# EAGLE board prototype_total_schematic_2355_Depricated (EAGLE 8.4.1)
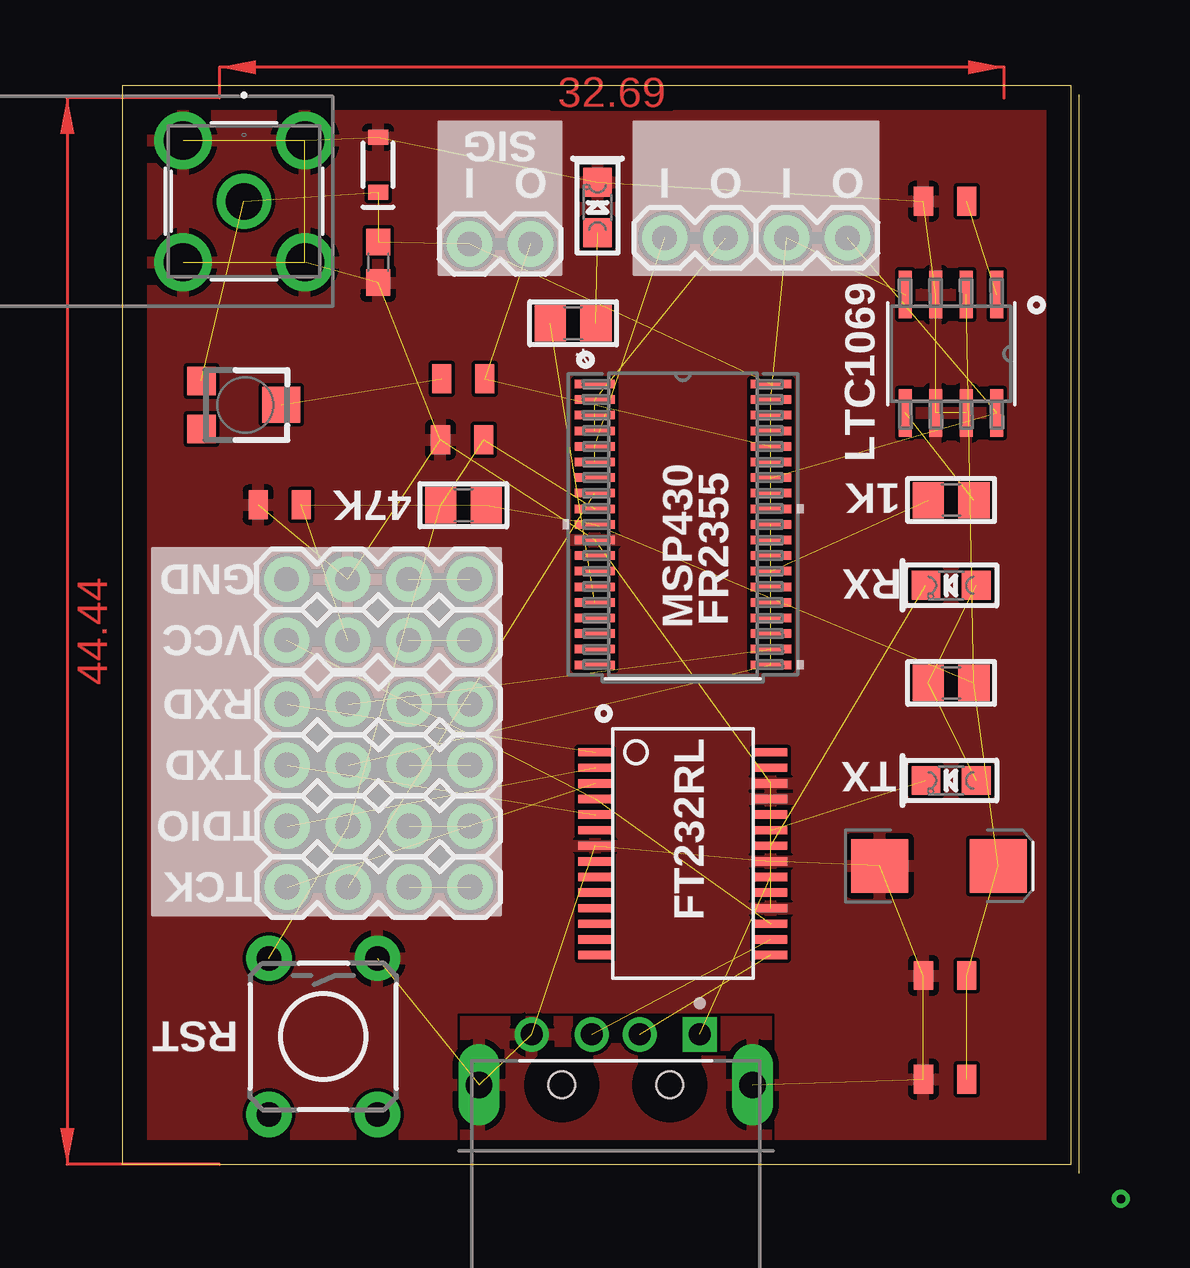
[diagram p0: board, top side]
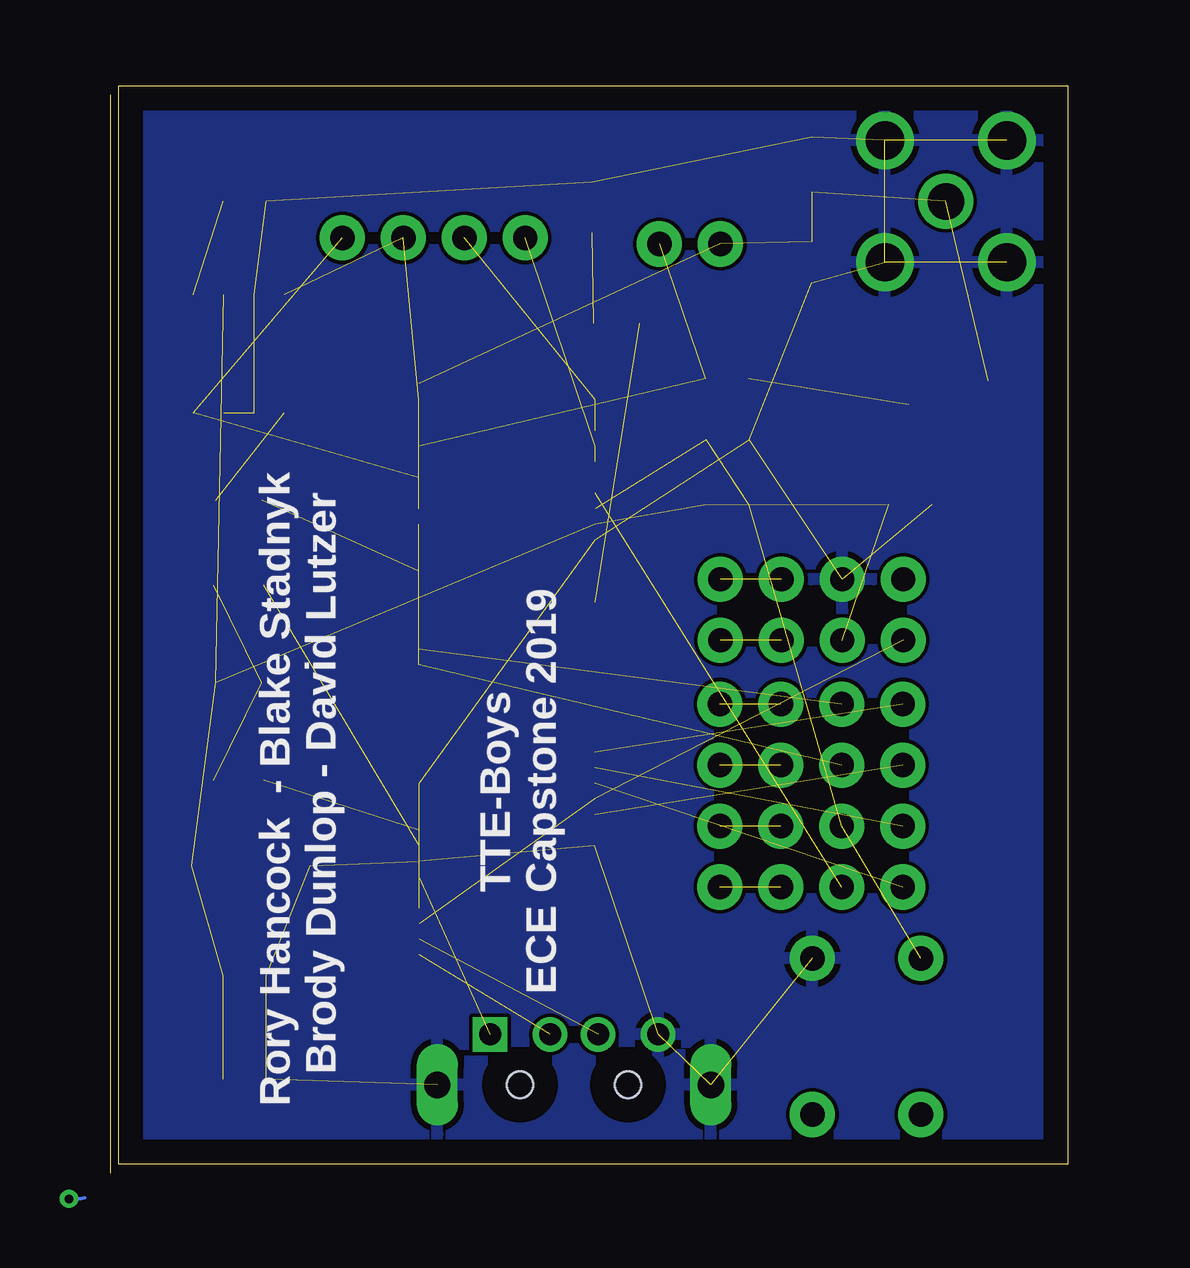
[diagram p1: board, bottom side, seen from below]

Size 39.88 x 45.32 mm. Coordinates in mm from the lower left corner, seen from the top.
Outline: 39.88,0 39.88,44.95
Outline: 0,0.37 39.55,0.37 39.55,45.32 0,45.32 0,0.37
Copper layers (1*16): Top 0.035mm / dielectric 1.5mm / Bottom 0.035mm
Design rules "default": minimum track width 6mil, minimum drill 0.35mm, track to track 6mil, track to pad 6mil, pad to pad 6mil, via to via 6mil, smd to smd 6mil, copper to edge 40mil, drill to drill 6mil, minimum pad ring 10mil, minimum via ring 8mil, stop-mask expansion 4mil, vias tented up to drill 0mil, thermal gap 10mil

## Footprints (pad centres in the part's own frame; a part is rotated, then mirrored left to right if it is on the bottom)
0805 = smd 1.3 x 1.5: 1 -0.95,0; 2 0.95,0
EIA6032-NOM = smd 2.37 x 2.23: A 2.47,0; C -2.47,0
0805' = smd 0.8 x 1.2: 1 -0.9,0; 2 0.9,0
SOD-323 = smd 0.63 x 0.83: A 1.15,0; C -1.15,0
1X02 = drill 1.016 pad 1.88: 1 0,0; 2 2.54,0
SSOP28DB = smd 0.348 x 1.397: 1 -4.225,-3.656; 2 -3.575,-3.656; 3 -2.925,-3.656; 4 -2.275,-3.656; 5 -1.625,-3.656; 6 -0.975,-3.656; 7 -0.325,-3.656; 8 0.325,-3.656; 9 0.975,-3.656; 10 1.625,-3.656; 11 2.275,-3.656; 12 2.925,-3.656; 13 3.575,-3.656; 14 4.225,-3.656; 15 4.225,3.656; 16 3.575,3.656; 17 2.925,3.656; 18 2.275,3.656; 19 1.625,3.656; 20 0.975,3.656; 21 0.325,3.656; 22 -0.325,3.656; 23 -0.975,3.656; 24 -1.625,3.656; 25 -2.275,3.656; 26 -2.925,3.656; 27 -3.575,3.656; 28 -4.225,3.656
1X04 = drill 1.016 pad 1.88: 1 0,0; 2 2.54,0; 3 5.08,0; 4 7.62,0
MOLEX_48037-0001_0 = drill 0.92 pad 1.42 square: 1 3.5,10.5 | drill 0.92 pad 1.42: 2 1,10.5; 3 -1,10.5; 4 -3.5,10.5 | drill 1.1 pad 1.7 long: 5 -5.7,8.4; 6 5.7,8.4 | hole 1.1: -2.25,8.4; 2.25,8.4
DA38 = smd 1.676 x 0.356: 1 -3.67,5.85; 2 -3.67,5.2; 3 -3.67,4.55; 4 -3.67,3.9; 5 -3.67,3.25; 6 -3.67,2.6; 7 -3.67,1.95; 8 -3.67,1.3; 9 -3.67,0.65; 10 -3.67,0; 11 -3.67,-0.65; 12 -3.67,-1.3; 13 -3.67,-1.95; 14 -3.67,-2.6; 15 -3.67,-3.25; 16 -3.67,-3.9; 17 -3.67,-4.55; 18 -3.67,-5.2; 19 -3.67,-5.85; 20 3.67,-5.85; 21 3.67,-5.2; 22 3.67,-4.55; 23 3.67,-3.9; 24 3.67,-3.25; 25 3.67,-2.6; 26 3.67,-1.95; 27 3.67,-1.3; 28 3.67,-0.65; 29 3.67,0; 30 3.67,0.65; 31 3.67,1.3; 32 3.67,1.95; 33 3.67,2.6; 34 3.67,3.25; 35 3.67,3.9; 36 3.67,4.55; 37 3.67,5.2; 38 3.67,5.85
0603 = smd 1.1 x 1: 1 -0.85,0; 2 0.85,0
5-1814400-1 = drill 1.524 pad 2.032: 1 0,0 | drill 1.6 pad 2.083: 2 -2.54,2.54; 3 -2.54,-2.54; 4 2.54,-2.54; 5 2.54,2.54
TACTILE_SWITCH_PTH_6.0MM = drill 1.016 pad 1.88: 1 -3.251,2.261; 2 3.251,2.261; 3 -3.251,-2.261; 4 3.251,-2.261
CHIPLED_0805 = smd 1.2 x 1.2: A 0,-1.05; C 0,1.05
SO-8_S = smd 1.981 x 0.533: 1 -2.464,1.905; 2 -2.464,0.635; 3 -2.464,-0.635; 4 -2.464,-1.905; 5 2.464,-1.905; 6 2.464,-0.635; 7 2.464,0.635; 8 2.464,1.905
TC33X = smd 1.2 x 1.2: 1 -1,-1.825; 3 1,-1.825 | smd 1.5 x 1.6: 2 0,1.5

## Placement (x,y rotation side)
1K  1k  [0805]  34.54,28.06 0 top
47K  47k  [0805]  14.22,27.84 0 top
C1  10µF  [EIA6032-NOM]  34.04,12.82 0 top
C2  100nF  [0805']  34.29,8.24 180 top
C3  22uF  [0805']  34.29,3.93 180 top
C4  470n  [0805']  34.29,40.5 0 top
C5  .1u  [0805']  6.57,27.86 0 top
C6  1n  [0805']  14.17,30.56 180 top
C7  22p  [0805']  14.22,33.11 180 top
D1  3.3V  [SOD-323]  10.67,42.03 90 top
FILT  FILT  [1X02]  30.23,38.98 180 top
FT232RL  FT232RL-BASICSSOP  [SSOP28DB]  23.37,13.32 270 top
GND  455-1750-1-ND  [1X04]  6.86,24.75 0 top
J2  MOLEX_48037-0001MOLEX_48037-0001_0_0  [MOLEX_48037-0001_0]  20.57,-4.71 0 top
J4  RX  [1X02]  25.15,38.98 180 top
MSP430  MSP430FR2355  [DA38]  23.37,27.04 0 top
R2  330  [0805]  18.8,35.42 180 top
R4  1M  [0603]  10.67,37.96 270 top
R6  330  [0805]  34.54,20.44 0 top
RIGHT_ANGLE_SMA_MALE  5-1814400-1  [5-1814400-1]  5.08,40.5 90 top
RST  [TACTILE_SWITCH_PTH_6.0MM]  8.38,5.7 270 top
RX  [CHIPLED_0805]  34.54,24.5 90 top
RXD  455-1750-1-ND  [1X04]  6.88,19.55 0 top
SIG  RX  [1X02]  14.48,38.72 0 top
STATUS  [CHIPLED_0805]  19.81,40.25 0 top
TCK  455-1750-1-ND  [1X04]  6.88,11.93 0 top
TDIO  455-1750-1-ND  [1X04]  6.88,14.47 0 top
TL069  LTC1069-7CS8#PBF  [SO-8_S]  34.54,34.15 270 top
TM2  100  [TC33X]  5.13,32.02 270 top
TX  [CHIPLED_0805]  34.54,16.37 90 top
TXD  455-1750-1-ND  [1X04]  6.88,17.01 0 top
VCC  455-1750-1-ND  [1X04]  6.86,22.21 0 top

## Library data of the parts
1K 47K R2 R6 RX STATUS TX = microbuilder
C1 = SparkFun-Capacitors; PROD_ID: CAP-12984
C2-C7 = SparkFun-Capacitors; PROD_ID: CAP-08402
D1 = SparkFun-DiscreteSemi; PROD_ID: DIO-11284
FILT J4 SIG = SparkFun-Connectors
FT232RL = SparkFun
GND RXD TCK TDIO TXD VCC = SparkFun-Connectors; PROD_ID: CONN-09696
J2 = TTE; CENTROID_NOT_SPECIFIED: No; DATASHEET: http://www.molex.com/elqNow/elqRedir.htm?ref=http://www.molex.com/pdm_docs/sd/480370001_sd.pdf; DIGIKEY_DESCRIPTION: CONN PLUG USB 4POS RT ANG PCB; DIGIKEY_PART_NUMBER: WM17117-ND; IMPORTED_FROM: octopart; IS_FEMALE: yes; LEAD_FREE: yes; MF: Molex; MOUSER_PART_NUMBER: 538-48037-0001; MPN: 48037-0001; NUM_PINS: 2; OCTOPART_PART_NUMBER: 6671af1c981eb9b6; PACKAGE: CONN_USB_PTH_18MM8_12MM0; PREFIX: J; ROHS: yes; TEMPERATURE_RANGE_HIGH: +85°C; TEMPERATURE_RANGE_LOW: -20°C
MSP430 = TTE
R4 = SparkFun-Resistors; PROD_ID: RES-08296
RIGHT_ANGLE_SMA_MALE = TTE; MANUFACTURER_PART_NUMBER: 518144001; VENDOR: TE Connectivity
RST = SparkFun-Switches; PROD_ID: SWCH-08441; SF_SKU: COM-00097
TL069 = TTE; DESCRIPTION: LTC1069-7 - Linear Phase 8th Order Lowpass Filter; DIGI-KEY_PART_NUMBER: LTC1069-7CS8#PBF-ND; DIGI-KEY_PURCHASE_URL: https://www.digikey.com/product-detail/en/linear-technology-analog-devices/LTC1069-7CS8-PBF/LTC1069-7CS8-PBF-ND/889060?utm_source=snapeda&utm_medium=aggregator&utm_campaign=symbol; MF: Linear Technology; MP: LTC1069-7CS8#PBF; PACKAGE: SOIC-8 Linear Technology
TM2 = adafruit

## Nets
ADC: J4.2 MSP430.5 MSP430.6
ANTENNA_SIG: D1.C MSP430.38 R4.1 RIGHT_ANGLE_SMA_MALE.1 SIG.1 TM2.1
ANTENNA_TX_SIG: C7.1 MSP430.34 SIG.2
BCLUART_RXD: MSP430.21 MSP430.29 RXD.2
BCLUART_RXD_EXT: RXD.3 RXD.4
BCLUART_RXD_USB: FT232RL.1 RXD.1
BCLUART_TXD: MSP430.20 MSP430.28 TXD.2
BCLUART_TXD_EXT: TXD.3 TXD.4
BCLUART_TXD_USB: FT232RL.5 TXD.1
FILTER_CLK: 1K.1 MSP430.26
FILTER_IN: FILT.2 MSP430.30 MSP430.37 TL069.4
FILTER_OUT: FILT.1 MSP430.32 TL069.8
GND: C1.C C2.2 C3.2 C4.1 C5.1 C6.2 D1.A FT232RL.7 FT232RL.18 FT232RL.21 FT232RL.25 FT232RL.26 GND.2 J2.4 J2.5 J2.6 MSP430.11 R4.2 RIGHT_ANGLE_SMA_MALE.2 RIGHT_ANGLE_SMA_MALE.3 RIGHT_ANGLE_SMA_MALE.4 RIGHT_ANGLE_SMA_MALE.5 RST.1 STATUS.C TL069.3 TL069.6 TL069.7
GND_EXT: GND.3 GND.4
GND_USB: GND.1
N$1: 1K.2 TL069.5
N$2: C7.2 TM2.2
N$3: C4.2 TL069.1
N$19: R2.1 STATUS.A
N$20: FT232RL.22 RX.C
N$21: FT232RL.23 TX.C
N$22: R6.1 RX.A TX.A
P3.0/MCLK: MSP430.3
P3.6/OA3-: MSP430.33
RST/SBWTDIO: 47K.1 C6.1 MSP430.9 RST.3 TDIO.2
RST/SBWTDIO_EXT: TDIO.3 TDIO.4
RST/SBWTDIO_USB: FT232RL.2 TDIO.1
RX_PGA_1: J4.1 MSP430.2 MSP430.4
STATUS_LED: MSP430.15 R2.2
TEST/SSBWTCK: MSP430.8 TCK.2
TEST/SSBWTCK_USB: FT232RL.3 TCK.1
TST/SBWTCK_EXT: TCK.3 TCK.4
USB_DATA_+: FT232RL.15 J2.2
USB_DATA_-: FT232RL.16 J2.3
V_USB: FT232RL.20 J2.1
VCC: 47K.2 C1.A C2.1 C3.1 C5.2 MSP430.10 R6.2 TL069.2 VCC.2
VCC_EXT: VCC.3 VCC.4
VCC_USB: FT232RL.4 FT232RL.17 VCC.1

## Tracks (layer width: path | path; a pad name or v marks a point on that pad's centre or on a via)
ADC  (2 unrouted)
ANTENNA_SIG  (5 unrouted)
ANTENNA_TX_SIG  (2 unrouted)
BCLUART_RXD  (2 unrouted)
BCLUART_RXD_EXT  (1 unrouted)
BCLUART_RXD_USB  (1 unrouted)
BCLUART_TXD  (2 unrouted)
BCLUART_TXD_EXT  (1 unrouted)
BCLUART_TXD_USB  (1 unrouted)
FILTER_CLK  (1 unrouted)
FILTER_IN  (3 unrouted)
FILTER_OUT  (2 unrouted)
GND  (26 unrouted)
  pour Top: -2.47,46.23 41.73,46.48 41.73,-1.02 -2.47,-1.27
  pour Bottom: -1.7,46.48 40.97,46.48 40.97,-1.02 -1.7,-1.02
GND1  (via drill 0.35)
  Top 0.152: v41.62,-1.06 41.73,-1.02
  Bottom 0.152: v41.62,-1.06 41.16,-1.06 40.97,-1.02
GND_EXT  (1 unrouted)
N$1  (1 unrouted)
N$2  (1 unrouted)
N$3  (1 unrouted)
N$19  (1 unrouted)
N$20  (1 unrouted)
N$21  (1 unrouted)
N$22  (2 unrouted)
RST/SBWTDIO  (4 unrouted)
RST/SBWTDIO_EXT  (1 unrouted)
RST/SBWTDIO_USB  (1 unrouted)
RX_PGA_1  (2 unrouted)
STATUS_LED  (1 unrouted)
TEST/SSBWTCK  (1 unrouted)
TEST/SSBWTCK_USB  (1 unrouted)
TST/SBWTCK_EXT  (1 unrouted)
USB_DATA_+  (1 unrouted)
USB_DATA_-  (1 unrouted)
V_USB  (1 unrouted)
VCC  (8 unrouted)
VCC_EXT  (1 unrouted)
VCC_USB  (2 unrouted)
(copper drawn outside any net)
  shapes: Top area x2

## Text on the board
tPlace: SIG | LTC1069 | FR2355
tNames: I | O | I | O | I | O
bNames: TTE-Boys / ECE Capstone 2019 | Rory Hancock - Blake Stadnyk / Brody Dunlop - David Lutzer